# Altium PCB UL-SWAP-DAQ-3-MAIN.PcbDoc (part 1 of 2)
Units mil, origin at the board's own origin, x right, y up, seen from the top; angles counter-clockwise.
Board outline 1500 x 1860 mil, 4 copper layers (Top Layer, GND, PWR, Bottom Layer), stack 23.756 mil thick; 70 components, 75 nets, 346 pads, 55 vias.
Unrouted connection lines stored in the file: 21.
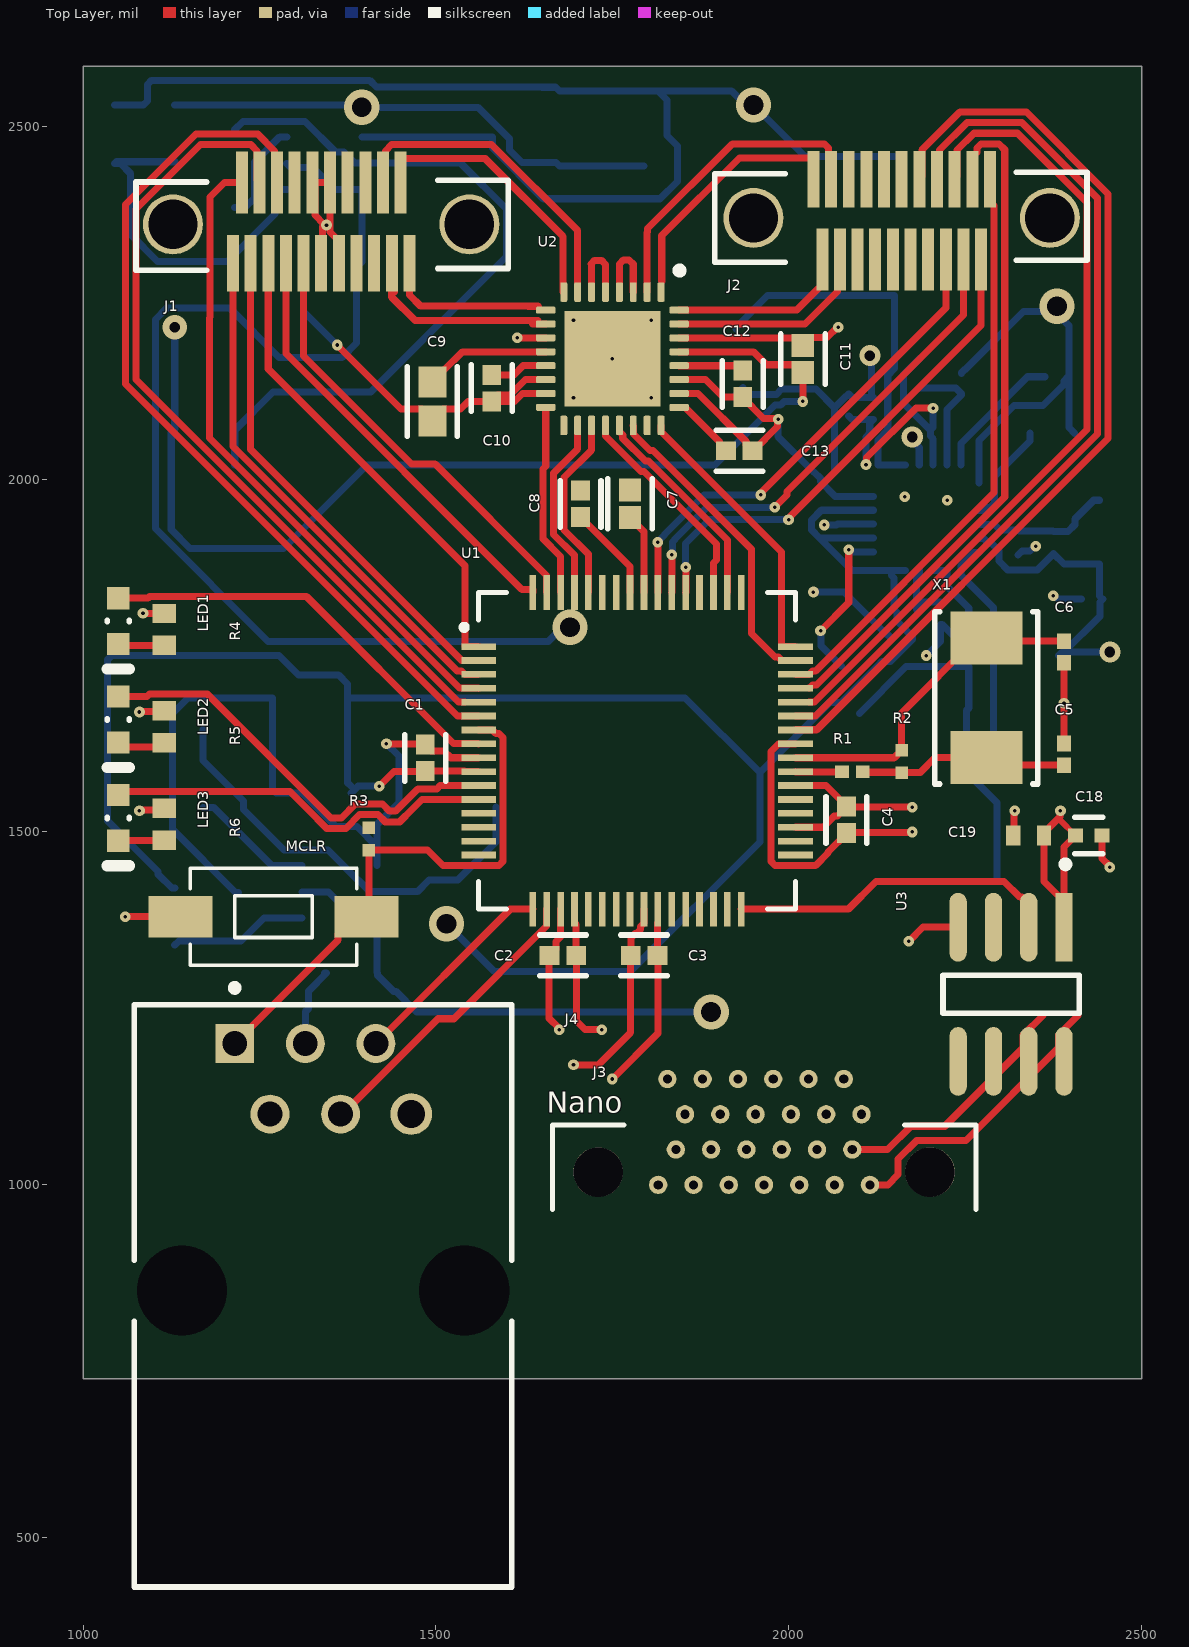
[diagram p0: Top Layer view]
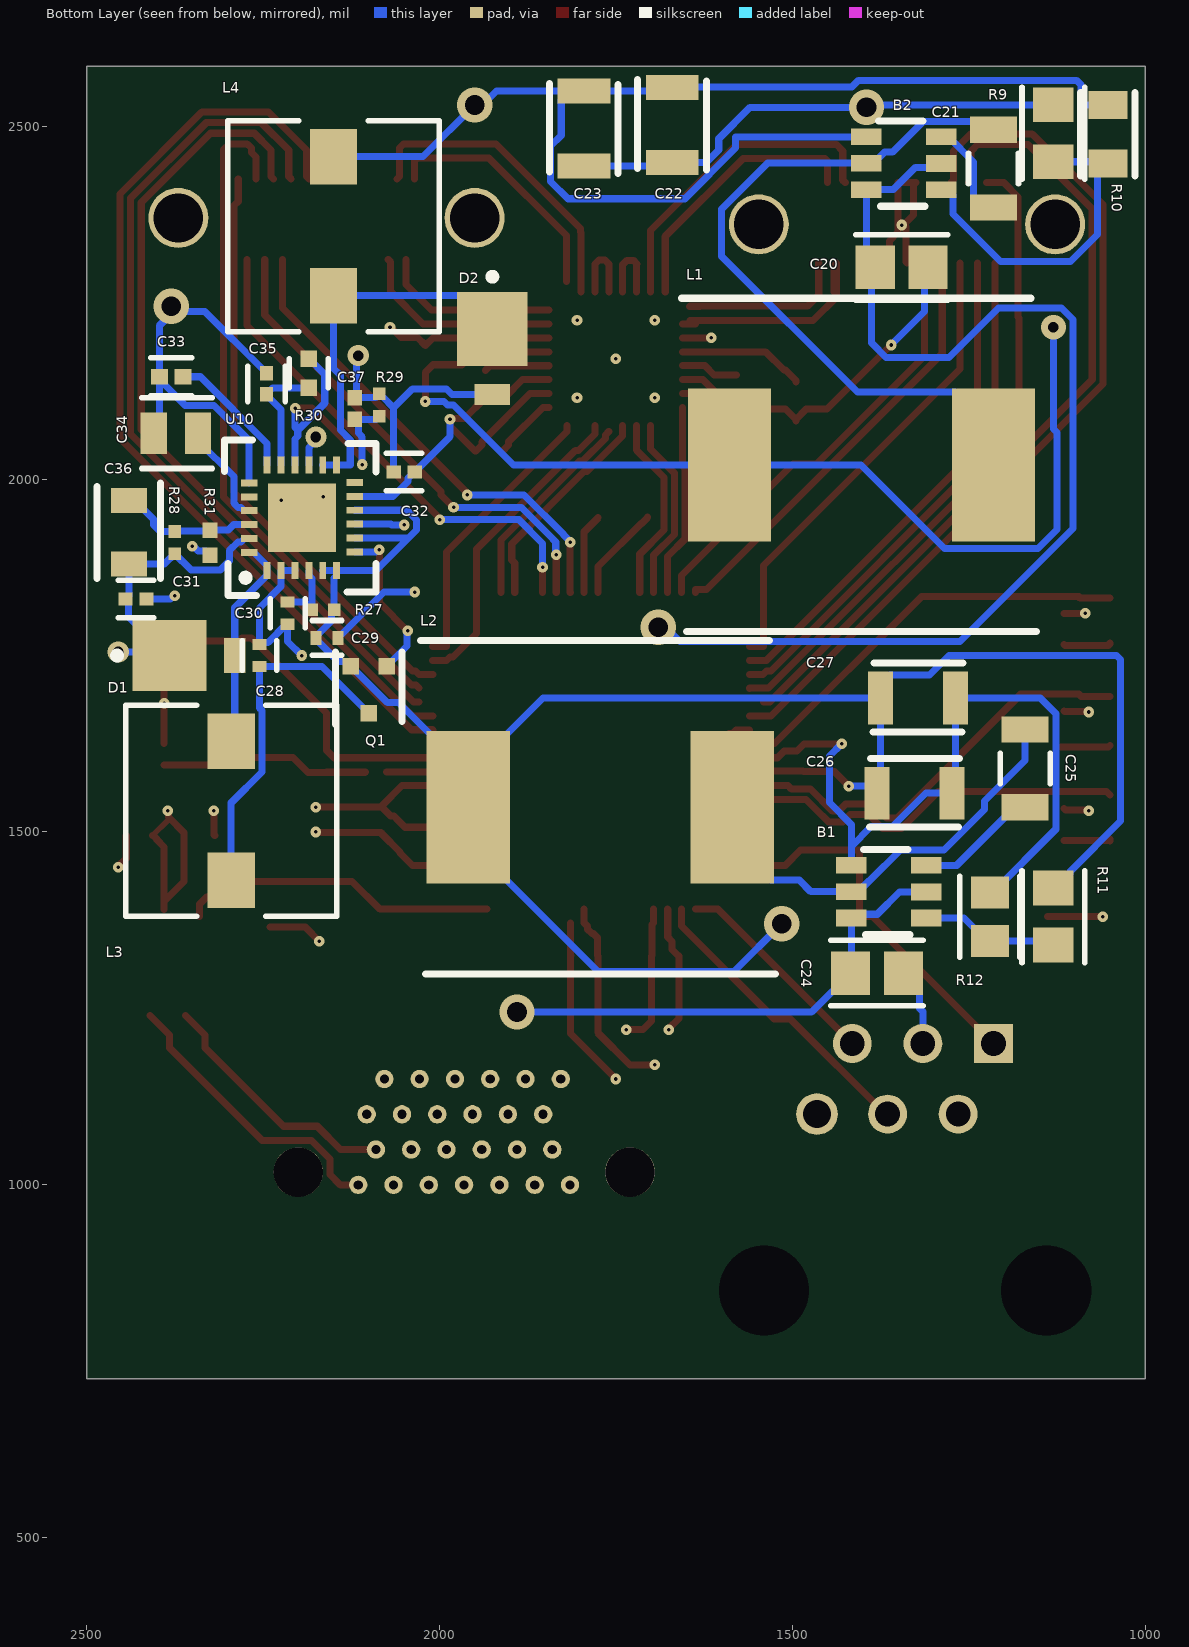
[diagram p1: Bottom Layer view, seen from below]
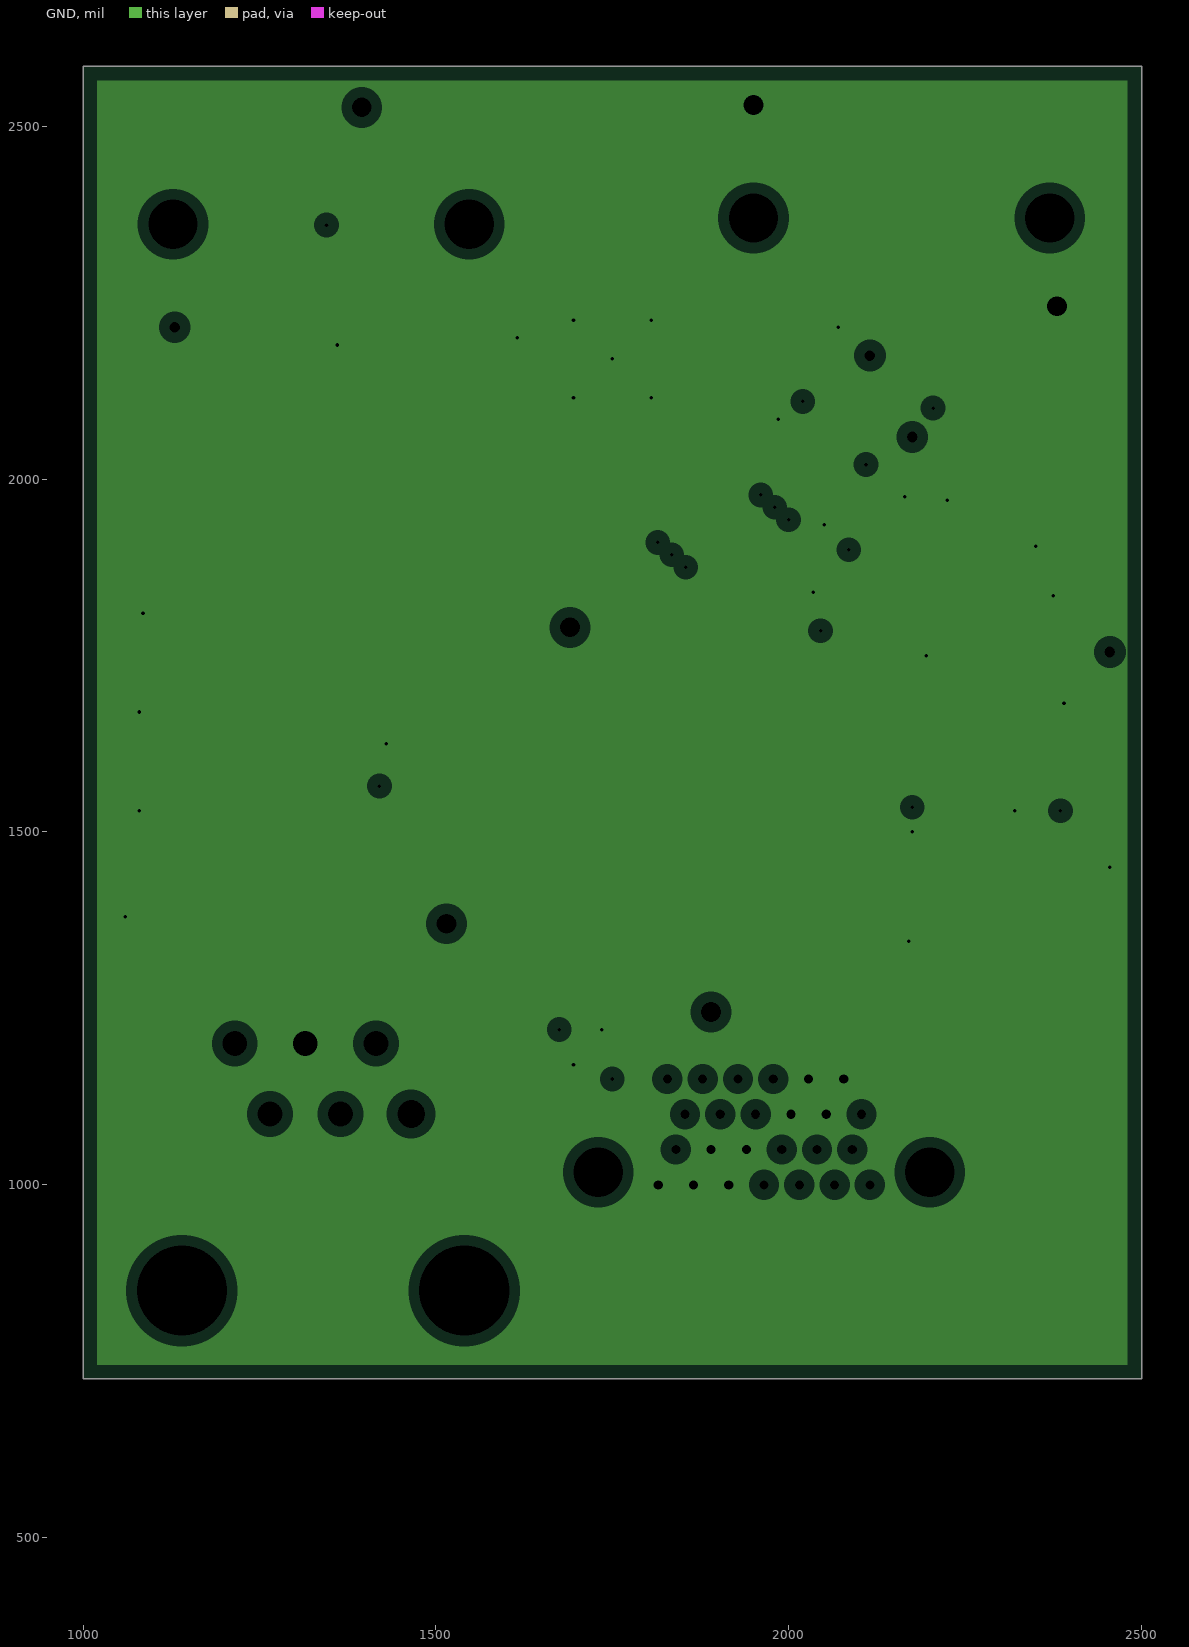
[diagram p2: GND, clearances drawn from the general rule]
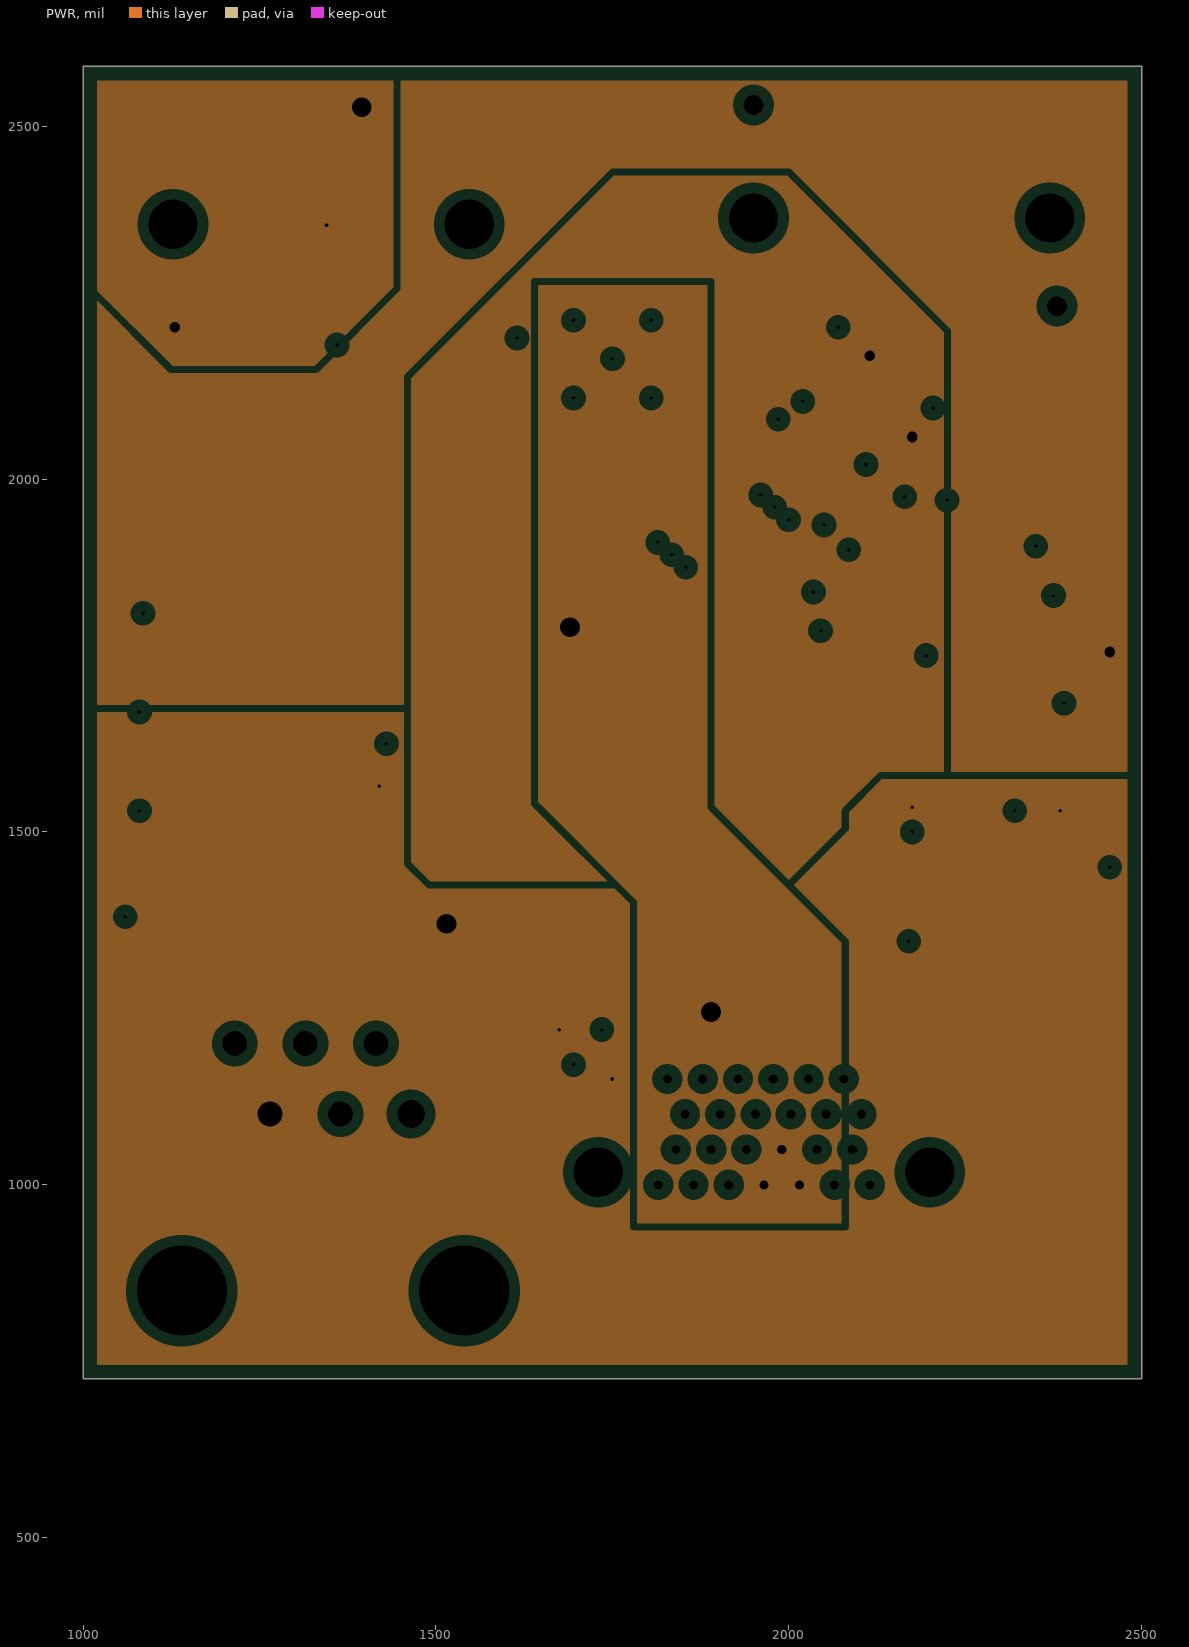
[diagram p3: PWR, clearances drawn from the general rule]
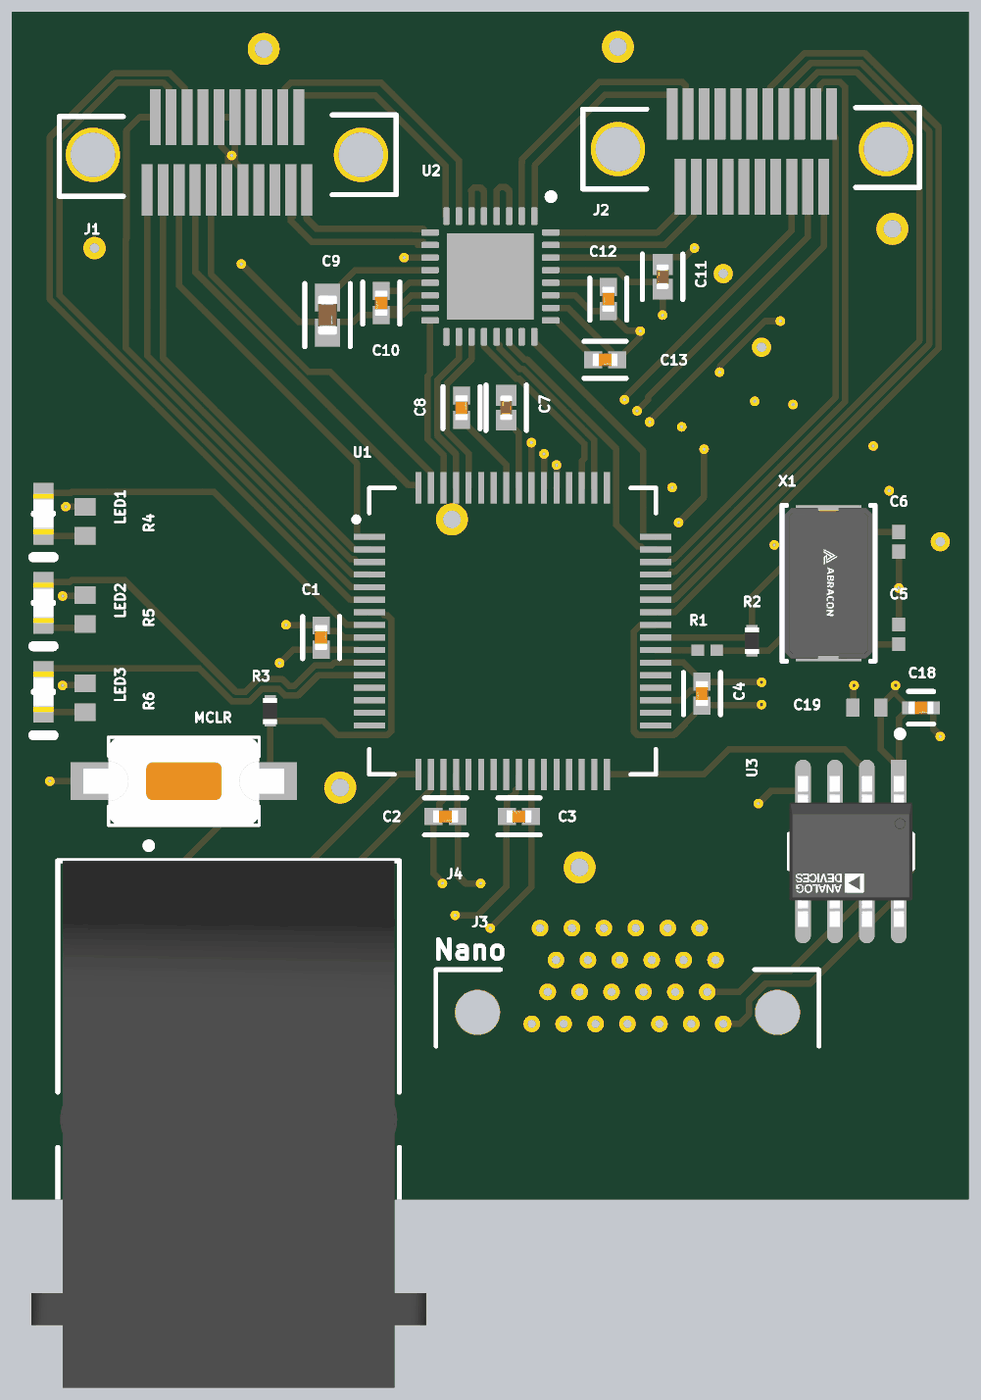
[diagram p4: 3D render of the assembled board from above, using the file's embedded part models]
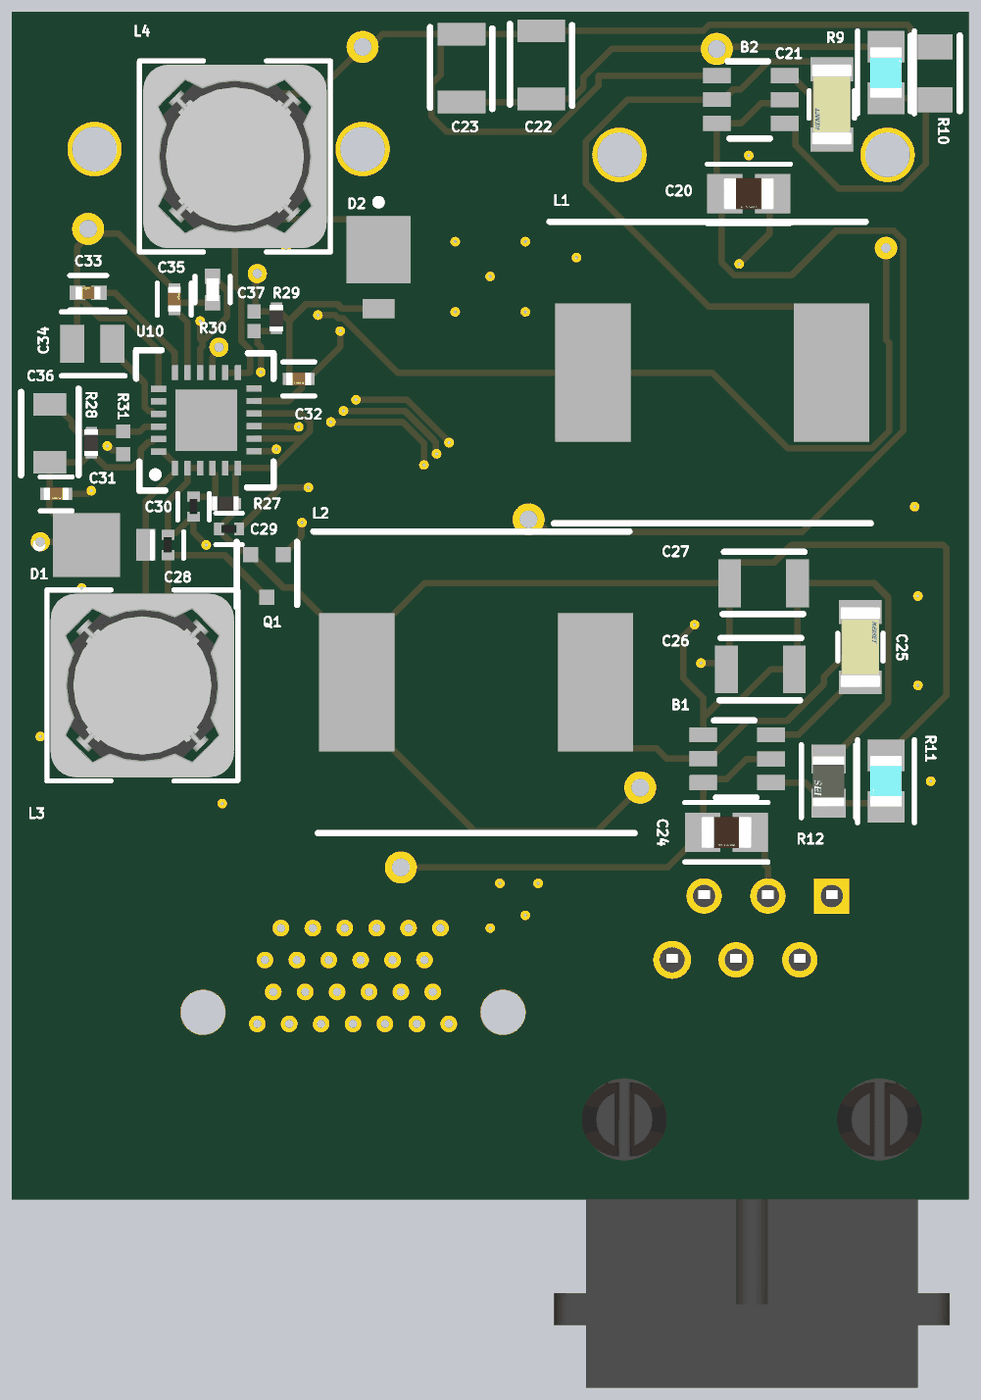
[diagram p5: 3D render of the assembled board from below, using the file's embedded part models]

## Layer stack, top to bottom
Top Solder: solder mask 0.4, Solder Resist, Dk 3.5
Top Layer: signal copper 1.4
Dielectric 2: prepreg 2.8, PP-006, Dk 4.1
GND: plane copper 1.378, net GND
Dielectric 1: dielectric 12.6, FR-4, Dk 4.8
PWR: plane copper 1.378, net (Multiple Nets)
Dielectric 3: prepreg 2.8, PP-006, Dk 4.1
Bottom Layer: signal copper 1.4
Bottom Solder: solder mask 0.4, Solder Resist, Dk 3.5

## Board outline
1000,725 2500,725 2500,2585 1000,2585

## Design rules (kind name [scope] priority, off if disabled: settings)
Clearance [All] p1: gap=5 ignorepadtopadclearanceinfootprint=FALSE
ComponentClearance [All] p1: gap=1 collisioncheckmode=3 verticalgap=100000 showdistances=FALSE
DiffPairsRouting [All] p1: maxlimit=10 minlimit=10 mostfreqgap=10 toplayer_minwidth=10 toplayer_maxwidth=15 toplayer_prefwidth=15 bottomlayer_minwidth=10 bottomlayer_maxwidth=15 bottomlayer_prefwidth=15 maxuncoupledlength=500
HoleSize [All] p1: absolutevalues=TRUE maxlimit=150 minlimit=1 maxpercent=80.000 minpercent=20.000
MinimumSolderMaskSliver [All] p1: minsoldermaskwidth=2
NetAntennae [All] p1: netantennaetolerance=5
PlaneClearance [All] p1: clearance=15
PlaneConnect OtherNets [All] p1: pad.planeconnectstyle=Direct pad.reliefexpansion=20 pad.reliefentries=4 pad.reliefconductorwidth=10 pad.reliefairgap=10 via.planeconnectstyle=Relief via.reliefexpansion=20 via.reliefentries=4 via.reliefconductorwidth=10 via.reliefairgap=10
PolygonConnect [All] p1: connectstyle=Relief reliefconductorwidth=10 reliefentries=4 polygonreliefangle="90 Angle" airgapwidth=10
RoutingVias [All] p1: holewidth=15 width=30 viastyle="Through Hole" minholewidth=10 minwidth=15 maxholewidth=50 maxwidth=100
ShortCircuit [All] p1: allowed=TRUE
SilkToSilkClearance [All] p1: silktosilkclearance=4
SilkToSolderMaskClearance [IsPad] p1: minsilkscreentomaskgap=4 clearancetoexposedcopper=TRUE
SolderMaskExpansion [All] p1: expansion=0 istentingtop=FALSE
Width [All] p1: maxlimit=200 minlimit=5 preferedwidth=10
20 further rules are at their usual default settings.

## Classes and differential pairs
component class U_TPS6513x: C28 C29 C30 C31 C32 C33 C34 C35 C36 C37 D1 D2 L3 L4 Q1 R27 R28 R29 R30 R31 U10
component class U_LVDS_Driver_Subsystem: C18 C19 J3 U3
component class U_LMR514203.3V: B1 C24 C25 C26 C27 L2 R11 R12
component class U_ICD4_Interface_Module: J4
component class U_ADC_Subsystem: C9 C10 C11 C12 C13 U2
component class MAIN-MODULE: J1 J2
component class Designator: C1 C2 C3 C4 C5 C6 C7 C8 LED1 LED2 LED3 MCLR R1 R2 R3 R4 R5 R6 SS U1 X1
differential pair DOUT: +DOUT_P -DOUT_N
differential pair ADC_CH6_CH7: +ADC_CH6_CH7_P -ADC_CH6_CH7_N
differential pair ADC_CH4_CH5: +ADC_CH4_CH5_P -ADC_CH4_CH5_N
differential pair ADC_CH2_CH3: +ADC_CH2_CH3_P -ADC_CH2_CH3_N
differential pair ADC_CH0_CH1: +ADC_CH0_CH1_P -ADC_CH0_CH1_N

## Components (designator, comment, footprint, x,y, rotation, side; value= is the part's Value field where it differs from the comment)
B1 "" LMR51420IC 1416.3,1452.8 r180 bottom
B2 "" LMR51420IC 1395,2485 r180 bottom
C1 "GRM155R61E104KA87D" FP-GRM155-0_05-IPC_A 1485,1605 r90 top
C2 "GRM155R61E104KA87D" FP-GRM155-0_05-IPC_A 1680,1325 r0 top
C3 "GRM155R61E104KA87D" FP-GRM155-0_05-IPC_A 1795,1325 r180 top
C4 "GRM155R61E104KA87D" FP-GRM155-0_05-IPC_A 2081.76,1517.22 r270 top
C5 "18pF" CAPC1005X55X25LL05T10 2390,1610 r90 top
C6 "18pF" CAPC1005X55X25LL05T10 2390,1755 r270 top
C7 "GRM155R60J106ME44D" FP-GRM155-0_2-IPC_A 1775,1965 r90 top
C8 "GRM155R61E104KA87D" FP-GRM155-0_05-IPC_A 1705,1965 r90 top
C9 "GRM188R60J476ME15D" FP-GRM188-0_2-IPC_B 1495,2110 r270 top
C10 "GRM155R61E104KA87D" FP-GRM155-0_05-IPC_A 1579.19,2128.84 r270 top
C11 "GRM155R60J106ME44D" FP-GRM155-0_2-IPC_A 2020,2170 r90 top
C12 "GRM155R61E104KA87D" FP-GRM155-0_05-IPC_A 1935,2135 r270 top
C13 "GRM155R61E104KA87D" FP-GRM155-0_05-IPC_A 1930,2040 r0 top
C18 "GRM155R61E104KA87D" FP-GRM155-0_05-MFG 2425,1495 r0 top
C19 "TACK106M002PTA" CAPC1005X70X10NL20T00 2340,1495 r0 top
C20 "UMK212BBJ225MD-T" FP-0805-L_2_0_0_2-W_1_25-IPC_A 1345,2300 r180 bottom
C21 "C0603C104K4PAC7867" "CAP CER 0.1UF 16V X7R 0603" 1215,2440 r0 bottom value="0.10 μF"
C22 "Comment" Cap22uF_C1206C226M4PAC7800 1670,2555 r180 bottom value=22uF
C23 "Comment" Cap22uF_C1206C226M4PAC7800 1795,2550 r180 bottom value=22uF
C24 "UMK212BBJ225MD-T" FP-0805-L_2_0_0_2-W_1_25-IPC_A 1380,1300 r180 bottom
C25 "C0603C104K4PAC7867" "CAP CER 0.1UF 16V X7R 0603" 1170,1590 r180 bottom value="0.10 μF"
C26 "Comment" Cap22uF_C1206C226M4PAC7800 1273.7,1555 r270 bottom value=22uF
C27 "Comment" Cap22uF_C1206C226M4PAC7800 1268.7,1690 r270 bottom value=22uF
C28 "4.7uF" FP-GRM15-MFG 2255,1750 r90 bottom value=0.10μF
C29 "4.7uF" FP-GRM15-MFG 2159.25,1775 r180 bottom value=0.10μF
C30 "GRM155R71C104KA88D" FP-GRM15-MFG 2215,1810 r270 bottom value=0.10μF
C31 "CL05A226MQ5QUNC" FP-CL746-IPC_C 2430,1830 r180 bottom
C32 "CL05A226MQ5QUNC" FP-CL746-IPC_C 2050,2010 r180 bottom
C33 "GRM155R71H472KA01D" FP-GRM155-0_05-IPC_B 2380,2145 r0 bottom
C34 "C0402C103J4RAC" Yemet_0603 2342.01,2065 r270 bottom value="10,000 pF"
C35 "GRM155R71C224KA12D" FP-GRM155-0_05-IPC_C 2245,2135 r90 bottom
C36 "CGA1A2C0G1E6R8D030BA" 885012007027 2440,1879.45 r0 bottom
C37 "GRM1555C1H7R5CA01D" CAPC1005X55X25LL05T10 2120,2100 r90 bottom
D1 "MBRM120ET3G" ONSC-POWERMITE-2-457-04_D_V 2330,1750 r180 bottom
D2 "MBRM120ET3G" ONSC-POWERMITE-2-457-04_D_V 1925,2160 r270 bottom
J1 "A28200-021" A28200-021 1547.5,2361 r180 top
J2 "A28200-021" A28200-021 1950,2370 r0 top
J3 "Nano-D-Connector" A28400-025 2115,1000 r0 top
J4 "5520470-3" TECO-5520470-3_V 1340,905 r0 top
L1 "Inductor" "MSS1246H-103MED 10uH" 1215,2020 r270 bottom value=10uH
L2 "MSS1260H-822MED" "MSS1246H-103MED 10uH" 1585,1535 r270 bottom value=8.2uH
L3 "7447789004" WE-PD-S-PB 2295,1530 r90 bottom
L4 "7447789004" WE-PD-S-PB 2150,2358.43 r270 bottom
LED1 "" KING-APT1608SGC_V 1050,1798.76 r270 top
LED2 "" KING-APT1608SGC_V 1050,1659.38 r270 top
LED3 "" KING-APT1608SGC_V 1050,1520 r270 top
MCLR "434121043816" 434121043816 1270,1380 r0 top
Q1 "Comment" PCBComponent_1 2100,1735 r180 bottom
R1 "0R" RESC1005X40X25LL05T10 2090,1585 r0 top
R2 "1M" RESC1005X40X25LL05T05 2160,1600 r270 top
R3 "10k" RESC1005X40X25LL05T05 1405,1490 r90 top
R4 "330" RESC1609X50X30LL10T20 1115,1786.94 r90 top
R5 "330" RESC1609X50X30LL10T20 1115,1648.82 r90 top
R6 "330" RESC1609X50X30LL10T20 1115,1510.69 r90 top
R9 "RK73G2ATTD1003F" FP-RK73G2A-IPC_A 1130,2490 r90 bottom
R10 "RMCF0805FT13K7CT-ND" RMCF0805FT13K7_13.7k 1052.87,2530 r180 bottom value=13.7K
R11 "RK73G2ATTD1003F" FP-RK73G2A-IPC_A 1130,1380 r270 bottom
R12 "RMCF0805FG22K1" FP-RMCF0805-IPC_B 1220,1380 r270 bottom
R27 "ERJ-2RKF1000X" RESC1005X40X25LL05T05 2165,1815 r0 bottom
R28 "ERJ-2RKF1004X" RESC1005X40X25LL05T05 2375,1910 r270 bottom
R29 "ERJ-2RKF1004X" RESC1005X40X25LL05T05 2085,2105 r270 bottom
R30 "CRCW0402121KFKED" FP-CRCW0402-e3-MFG 2185,2150 r90 bottom
R31 "ERJ-2RKF1303X" RESC1005X40X25NL05T05 2325,1910 r90 bottom
U1 "PIC32MX470-F512H-120MR" TQFP 1785,1615 r0 top
U2 "LTC2373CUH-16#PBF" LTC_2373_Footprint 1750.16,2170.51 r270 top
U3 "ADN4661BRZ" FP-R-8-IPC_A 2315,1270 r270 top
U10 "TPS6513x" TPS6513final 2194.68,1945.2 r180 bottom
X1 "20MHz" FP-ABM7-MFG 2280,1690 r270 top

## Footprints (in the part's own frame and the unit in brackets; to place one, negate y for a bottom-side part, rotate by r counter-clockwise, add the part's x,y. Pads: shape width x height; smd on the part's side, far side on the other; paste and mask are expansions set on the pad)
434121043816 [mm] "6.0*3.5mm vertical type, SMD, height 4.3mm, black actuator, 160gf, T&R"
  rect 2.3x1.5 smd: 1(-3.35,0) 2(3.35,0)
  silkscreen extent -3,-1.75 3,1.75, body extent -4,-1.75 4,1.75, height 4.3
885012007027 [mm] "CER 6.8pF 25V C0G/NP0 0805"
  rect 1.3x0.9 smd: 1(0,0) 2(0,-2.3)
  silkscreen extent -1.14,-2.92 1.14,0.51
A28200-021 [mil] "CONN NANO-D PLUG 21POS SMD SLDR"
  rect 17x80 smd: 1(85,55) 2(110,55) 3(135,55) 4(160,55) 5(185,55) 6(210,55) 7(235,55) 8(260,55) 9(285,55) 10(310,55) 11(335,55) ""(135,55)
  rect 17x88 smd: 12(97.5,-59) 13(122.5,-59) 14(147.5,-59) 15(172.5,-59) 16(197.5,-59) 17(222.5,-59) 18(247.5,-59) 19(272.5,-59) 20(297.5,-59) 21(322.5,-59)
  round 85 hole 70: ""(0,0) ""(420,0)
  silkscreen extent -55,-63 473,65
A28400-025 [mil] "Nano D Connector Dual Row - 4 row hole pattern"
  round 26 hole 13: 1(0,0) 2(-25,50) 3(-50,0) 4(-75,50) 5(-100,0) 6(-125,50) 7(-150,0) 8(-175,50) 9(-200,0) 10(-225,50) 11(-250,0) 12(-275,50) 13(-300,0) 14(-12,100) 15(-37,150) 16(-62,100) 17(-87,150) 18(-112,100) 19(-137,150) 20(-162,100) 21(-187,150) 22(-212,100) 23(-237,150) 24(-262,100) 25(-287,150)
  round 70 hole 70: ""(-385,18) ""(85,18)
  silkscreen extent -450,-35 150,85, body extent -438,-274 138,185, height 140
Cap22uF_C1206C226M4PAC7800 [mm]
  rect 1.9x0.9 smd: 1(0,0) 2(0,-2.7)
  silkscreen extent -1.25,-2.98 1.22,0.28
"CAP CER 0.1UF 16V X7R 0603" [mm]
  rect 1.7x0.95 smd paste+0 mask+0: 1(-0.002,1.402) 2(-0.002,-1.398)
  silkscreen extent -0.9,-0.55 0.9,0.55, body extent -0.8,-1.6 0.8,1.6, height 0.88
CAPC1005X55X25LL05T10 [mm] "Chip Capacitor, 2-Leads, Body 1.00x0.50mm, IPC High Density"
  rect 0.56x0.52 smd: 1(-0.39,0) 2(0.39,0)
  body extent -0.53,-0.28 0.53,0.28, height 0.55
CAPC1005X70X10NL20T00 [mm] "Chip Capacitor, 2-Leads, Body 1.00x0.50mm, IPC Medium Density"
  rect 0.52x0.72 smd: 1(-0.55,0) 2(0.55,0)
  body extent -0.6,-0.35 0.6,0.35, height 0.7
FP-0805-L_2_0_0_2-W_1_25-IPC_A [mil]
  rect 55.42x61.5 smd paste+0 mask+0: 1(-37.49,0) 2(37.49,0)
  silkscreen extent -65,-46 65,46, body extent -39,-25 39,25, height 37
FP-ABM7-MFG [mm]
  rect 1.9x2.6 smd paste+0 mask+0: 1(-2.15,0) 2(2.15,0)
  silkscreen extent -3.1,-1.85 3.1,1.85, body extent -3.2,-1.95 3.2,1.95, height 0.25
FP-CL746-IPC_C [mil]
  rect 20.29x18.6 smd paste+0 mask+0: 1(-14.9,0) 2(14.9,0)
  silkscreen extent -25,-27 25,27, body extent -20,-10 20,10, height 22
FP-CRCW0402-e3-MFG [mm]
  rect 0.6x0.6 smd paste+0 mask+0: 1(-0.525,0) 2(0.525,0)
  silkscreen extent -0.53,-0.7 0.53,0.7, body extent -0.5,-0.25 0.5,0.25, height 0.4
FP-GRM15-MFG [mm]
  rect 0.4x0.5 smd paste+0 mask+0: 1(-0.4,0) 2(0.4,0)
  silkscreen extent -0.53,-0.63 0.53,0.63, body extent -0.3,-0.16 0.3,0.16, height 0.33
FP-GRM155-0_2-IPC_A [mil]
  rect 32.6x31.74 smd paste+0 mask+0: 1(-19.25,0) 2(19.25,0)
  silkscreen extent -36,-32 36,32, body extent -43,-24 43,24, height 10
FP-GRM155-0_05-IPC_A [mil]
  rect 28.16x26.48 smd paste+0 mask+0: 1(-18.84,0) 2(18.84,0)
  silkscreen extent -33,-29 33,29, body extent -41,-21 41,21, height 10
FP-GRM155-0_05-IPC_B [mil]
  rect 24.23x22.54 smd paste+0 mask+0: 1(-16.87,0) 2(16.87,0)
  silkscreen extent -29,-27 29,27, body extent -20,-10 20,10, height 22
FP-GRM155-0_05-IPC_C [mil]
  rect 20.29x18.6 smd paste+0 mask+0: 1(-14.9,0) 2(14.9,0)
  silkscreen extent -25,-27 25,27, body extent -20,-10 20,10, height 22
FP-GRM155-0_05-MFG [mm]
  rect 0.55x0.5 smd paste+0 mask+0: 1(-0.475,0) 2(0.475,0)
  silkscreen extent -0.5,-0.65 0.5,0.65, body extent -0.85,-0.38 0.85,0.38, height 0.25
FP-GRM188-0_2-IPC_B [mil]
  rect 43.51x39.61 smd paste+0 mask+0: 1(-27.58,0) 2(27.58,0)
  silkscreen extent -49,-36 49,36, body extent -59,-30 59,30, height 10
FP-R-8-IPC_A [mil]
  rect 97.4x24.49 smd paste+0 mask+0: 1(-95.12,75)
  rrect100% 97.4x24.49 smd paste+0 mask+0: 2(-95.12,25) 3(-95.12,-25) 4(-95.12,-75) 5(95.12,-75) 6(95.12,-25) 7(95.12,25) 8(95.12,75)
  silkscreen extent -189,-96 27,96, body extent -164,-116 164,116, height 10
FP-RK73G2A-IPC_A [mil]
  rect 49.42x57.56 smd paste+0 mask+0: 1(-40.37,0) 2(40.37,0)
  silkscreen extent -65,-45 65,45, body extent -39,-25 39,25, height 24
FP-RMCF0805-IPC_B [mil]
  rect 45.46x53.63 smd paste+0 mask+0: 1(-34.48,0) 2(34.48,0)
  silkscreen extent -57,-43 57,43, body extent -39,-25 39,25, height 26
KING-APT1608SGC_V [mm] "SMD, 2-Leads, Body 0.8x1.6mm"
  rect 0.8x0.8 smd: 1(-0.825,0) 2(0.825,0)
  silkscreen extent -0.03,-0.4 1.73,0.4, body extent -0.8,-0.4 0.81,0.4, height 0.76
LMR51420IC [mm]
  rect 1.1x0.6 smd: 1(0,0) 2(0,-0.95) 3(0,-1.9) 4(2.7,-1.9) 5(2.7,-0.96) 6(2.7,0)
  silkscreen extent 0.43,-2.5 2.11,0.57
LTC_2373_Footprint [mm]
  rrect40% 0.7x0.25 smd: 1(-2.4,1.75) 2(-2.4,1.25) 3(-2.4,0.75) 4(-2.4,0.25) 5(-2.4,-0.25) 6(-2.4,-0.75) 7(-2.4,-1.25) 8(-2.4,-1.75) 17(2.4,-1.75) 18(2.4,-1.25) 19(2.4,-0.75) 20(2.4,-0.25) 21(2.4,0.25) 22(2.4,0.75) 23(2.4,1.25) 24(2.4,1.75)
  rrect40% 0.25x0.7 smd: 9(-1.75,-2.4) 10(-1.25,-2.4) 11(-0.75,-2.4) 12(-0.25,-2.4) 13(0.25,-2.4) 14(0.75,-2.4) 15(1.25,-2.4) 16(1.75,-2.4) 25(1.75,2.4) 26(1.25,2.4) 27(0.75,2.4) 28(0.25,2.4) 29(-0.25,2.4) 30(-0.75,2.4) 31(-1.25,2.4) 32(-1.75,2.4)
  rect 3.45x3.45 smd: 33(0,0)
  silkscreen extent -3.3,2.29 -3.05,2.54, body extent -2.54,-2.54 2.54,2.54, height 0.81
"MSS1246H-103MED 10uH" [mm]
  rect 5.5x3 smd: 1(0,0) 2(0,-9.5)
  silkscreen extent -6,-11.23 6,1.55
ONSC-POWERMITE-2-457-04_D_V [mil] "POWERMITE, 2-Leads, Body 1.965x1.9mm"
  rect 105.12x100 smd: 1(-52.56,0)
  rect 30x50 smd: 2(40,0)
  silkscreen extent -132,-5 -122,5, body extent -80,-37 -3,37, height 45
PCBComponent_1 [mm]
  rect 0.6x0.6 smd: 1(0,-1.7) 2(0.65,0) 3(-0.65,0)
  silkscreen extent -1.2,-2.1 1.2,0.5
RESC1005X40X25LL05T05 [mm] "Chip Resistor, 2-Leads, Body 1.05x0.55mm, IPC High Density"
  rect 0.45x0.45 smd: 1(-0.4,0) 2(0.4,0)
  body extent -0.53,-0.28 0.53,0.28, height 0.4
RESC1005X40X25LL05T10 [mm] "Chip Resistor, 2-Leads, Body 1.00x0.50mm, IPC High Density"
  rect 0.5x0.45 smd: 1(-0.375,0) 2(0.375,0)
  body extent -0.53,-0.27 0.53,0.28, height 0.4
RESC1005X40X25NL05T05 [mm] "Chip Resistor, 2-Leads, Body 1.00x0.50mm, IPC Medium Density"
  rect 0.55x0.55 smd: 1(-0.45,0) 2(0.45,0)
  body extent -0.53,-0.27 0.53,0.28, height 0.4
RESC1609X50X30LL10T20 [mm] "Chip Resistor, 2-Leads, Body 1.55x0.85mm, IPC High Density"
  rect 0.7x0.85 smd: 1(-0.575,0) 2(0.575,0)
  body extent -0.82,-0.48 0.82,0.48, height 0.5
RMCF0805FT13K7_13.7k [mm]
  rect 1.4x1 smd: 1(0,0) 2(0,-2.1)
  silkscreen extent -0.97,-2.55 0.97,0.45
TECO-5520470-3_V [mm] "THD, 6-Leads, Body 20.96x13.59mm, Pitch 1.27mm"
  rect 1.4x1.4 hole 0.89: 1(-3.175,7.5)
  round 1.4 hole 0.89: 2(-1.905,4.96) 3(-0.635,7.5) 4(0.635,4.96) 5(1.905,7.5)
  round 1.5 hole 1: 6(3.175,4.96)
  round 3 hole 3.25 unplated: MH1(-5.075,-1.39) MH2(5.085,-1.39)
  silkscreen extent -6.8,-12.06 6.8,9.62, body extent -7.87,-12.06 7.87,8.9, height 16.04
TPS6513final [mm] "boost and inverter"
  rect 0.25x0.6 smd: 1(-1.254,-1.9) 2(-0.754,-1.9) 3(-0.254,-1.9) 4(0.246,-1.9) 5(0.746,-1.9) 6(1.246,-1.9) 13(1.246,1.9) 14(0.746,1.9) 15(0.246,1.9) 16(-0.254,1.9) 17(-0.754,1.9) 18(-1.254,1.9)
  rect 0.6x0.25 smd: 7(1.9,-1.23) 8(1.9,-0.73) 9(1.9,-0.23) 10(1.9,0.27) 11(1.9,0.77) 12(1.9,1.27) 19(-1.9,1.254) 20(-1.9,0.754) 21(-1.9,0.254) 22(-1.9,-0.246) 23(-1.9,-0.746) 24(-1.9,-1.246)
  rect 2.45x2.45 smd: 25(0,0)
  silkscreen extent -2.79,-2.79 2.67,2.79
TQFP [mm]
  rect 1.25x0.24 smd: 1(-5.7,3.75) 2(-5.7,3.25) 3(-5.7,2.75) 4(-5.7,2.25) 5(-5.7,1.75) 6(-5.7,1.25) 7(-5.7,0.75) 8(-5.7,0.25) 9(-5.7,-0.25) 10(-5.7,-0.75) 11(-5.7,-1.25) 12(-5.7,-1.75) 13(-5.7,-2.25) 14(-5.7,-2.75) 15(-5.7,-3.25) 16(-5.7,-3.75) 33(5.7,-3.75) 34(5.7,-3.25) 35(5.7,-2.75) 36(5.7,-2.25) 37(5.7,-1.75) 38(5.7,-1.25) 39(5.7,-0.75) 40(5.7,-0.25) 41(5.7,0.25) 42(5.7,0.75) 43(5.7,1.25) 44(5.7,1.75) 45(5.7,2.25) 46(5.7,2.75) 47(5.7,3.25) 48(5.7,3.75)
  rect 0.24x1.25 smd: 17(-3.75,-5.7) 18(-3.25,-5.7) 19(-2.75,-5.7) 20(-2.25,-5.7) 21(-1.75,-5.7) 22(-1.25,-5.7) 23(-0.75,-5.7) 24(-0.25,-5.7) 25(0.25,-5.7) 26(0.75,-5.7) 27(1.25,-5.7) 28(1.75,-5.7) 29(2.25,-5.7) 30(2.75,-5.7) 31(3.25,-5.7) 32(3.75,-5.7) 49(3.75,5.7) 50(3.25,5.7) 51(2.75,5.7) 52(2.25,5.7) 53(1.75,5.7) 54(1.25,5.7) 55(0.75,5.7) 56(0.25,5.7) 57(-0.25,5.7) 58(-0.75,5.7) 59(-1.25,5.7) 60(-1.75,5.7) 61(-2.25,5.7) 62(-2.75,5.7) 63(-3.25,5.7) 64(-3.75,5.7)
  silkscreen extent -6.32,-5.7 5.7,5.7
WE-PD-S-PB [mm] "SMD Inductor, 2-Leads, Body 7.3x7.3x3.5 mm"
  rect 2x1.7 smd: 1(-2.5,0) 2(2.5,0)
  silkscreen extent -3.8,-3.8 3.8,3.8, body extent -3.65,-3.65 3.65,3.65, height 3.19
Yemet_0603 [mm] "220nF 16V X7R 10%"
  rect 1.5x0.95 smd: 1(0,0) 2(0,-1.6)
  silkscreen extent -1.27,-2.03 1.27,0.51

## Part data
B1 B2: library part Component_1
C1 C2 C3 C4 C8 C10 C12 C13 C18: library part CMP-2008-04580-2, "CAP CER 0.1UF 25V X5R 0402", Capacitance=100nF, Case Code (Imperial)=0402, Case Code (Metric)=1005, Dielectric=X5R, Max Operating Temperature=85°C, Min Operating Temperature=-55°C, Package Quantity=10000, Tolerance=10%, Voltage=25V, Case/Package=0402, Depth=0.5mm, Height=0.5mm, Lead Free="Lead Free", Lead/Base Style=Bayonet, Length=1mm, Material=Ceramic, Mount="Surface Mount", Packaging="Cut Tape", Radiation Hardening=No, REACH SVHC="No SVHC", RoHS Compliant=Yes, Series=GRM, Termination=Standard, Thickness=0.022inch, Voltage Rating=25V, Voltage Rating (DC)=25V, Weight=0.000388oz, Width=0.5mm
C5 C6: library part CMP-2008-04271-1, "GRM1555C1H180GA01D", Manufacturer=Murata, Part Number=GRM1555C1H180GA01D
C7 C11: library part CMP-2000-05265-2, "CAP CER 10UF 6.3V X5R 0402", Capacitance=10uF, Case Code (Imperial)=0402, Case Code (Metric)=1005, Dielectric=X5R, Max Operating Temperature=85°C, Min Operating Temperature=-55°C, Package Quantity=10000, Tolerance=20%, Voltage=6.3V, Case/Package=0402, Depth=0.5mm, Height=0.5mm, Lead Free="Lead Free", Length=1mm, Mount="Surface Mount", Packaging="Tape and Reel", REACH SVHC="No SVHC", RoHS Compliant=Yes, Series=GRM, Termination=SMD/SMT, Thickness=0.022inch, Voltage Rating=6.3V, Voltage Rating (DC)=6.3V, Width=0.5mm
C9: library part CMP-2000-05444-2, "Chip Multilayer Ceramic Capacitors for General Purpose, 0603, 47uF, X5R, 15%, 20%, 6.3V", Capacitance=47uF, Case Code (Imperial)=0603, Case Code (Metric)=1608, Dielectric=X5R, Max Operating Temperature=85°C, Min Operating Temperature=-55°C, Tolerance=20%, Voltage Rating=6.3V, Case/Package=0603, Length=0.063inch, Mount="Surface Mount", Packaging="Tape and Reel", Thickness=0.039inch, Voltage Rating (DC)=6.3V, Width=0.031inch
C19: library part CMP-2008-00067-1, Manufacturer="AVX Interconnect / Elco", Part Number=TACK106M002PTA
C20 C24: library part CMP-14477-004278-2, "Multilayer Ceramic Capacitor 2.2uF 50V X5R 20% SMD 0803 T/R", Capacitance=2.2uF, Case Code (Imperial)=0805, Case Code (Metric)=2012, Max Operating Temperature=85°C, Min Operating Temperature=-55°C, Tolerance=20%, Voltage Rating=50V, Case/Package=0805, Mount="Surface Mount", Packaging="Tape and Reel", RoHS Compliant=Yes
C21 C25: library part b4654b650e69147ec39a6b967a45e02, "CAP CER 0.1UF 16V X5R 0603", Capacitance="0.10 μF", Manufacturer=KEMET, Package=C0603C-CF, Temperature="-55°C to +125°C", Temperature Characteristic=X5R, Temperature Coefficient=30ppm/°C, Temperature Range High=+125°C, Temperature Range Low=-55°C, Tolerance=0.1, Voltage Rating="16 V", Automotive=Yes, Automotive Grade="Grade 1", Category=Cap, ComponentLink2Description=Datasheet, ComponentLink2URL=https://api.kemet.com/component-edge/download/datasheet/C0603C100J5GACAUTO.pdf, Device Class L1="Passive Components", Device Class L2=Capacitors, Device Class L3="Ceramic Capacitors", Digikey Description="CAP CER 0.1UF 16V X5R 0603", Height=0.87mm, Lead Free=Yes, Manufacturer Part Number=C0603C104K4PAC7867, Material=Ceramic, Octopart=https://octopart.com/c0603c104k4pactu-kemet-12592163, RoHS=TRUE
C22 C23 C26 C27: library part Cap, "Capacitor", LatestRevisionDate=17-Jul-2002, LatestRevisionNote="Re-released for DXP Platform.", PackageDescription="Radial Cap, Thru-Hole; 2 Leads; 0.3 in Pin Spacing", PackageReference=RAD-0.3, Published=8-Jun-2000, Publisher="Altium Limited"
C28 C29: library part CMP-2100-03641-2, "CAP CER 0.1UF 16V X7R 0402", Capacitance=0.10μF, Manufacturer=Murata, Manufacturer Part Number=GRM155R71C104KA88D, Package=GRM15, Temperature="-55°C to +125°C", Temperature Characteristic=X7R, Temperature Range High=+125°C, Temperature Range Low=-55°C, Tolerance=10%, Voltage Rating=16Vdc, Category=Cap, ComponentLink2Description=Datasheet, ComponentLink2URL=https://search.murata.co.jp/Ceramy/image/img/A01X/G101/ENG/GRM155R71H471KA01-01A.pdf, Device Class L1="Passive Components", Device Class L2=Capacitors, Device Class L3="Ceramic Capacitors", Digikey Description="CAP CER 0.1UF 16V X7R 0402", Height=0.55mm, Ipc Land Pattern Name=CAPC10050X219, Lead Free=yes, Material=Ceramic, Mouser Description="0402 0.1 uF 16V ±10 % Tolerance X7R SMT Multilayer Ceramic Capacitor", Octopart=https://octopart.com/grm155r71c104ka88d-murata-196880, RoHS=TRUE, Standoff Height=0mm
C30: library part CMP-2100-03641-2, "CAP CER 0.1UF 16V X7R 0402", Capacitance=0.10μF, Manufacturer=Murata, Package=GRM15, Temperature="-55°C to +125°C", Temperature Characteristic=X7R, Temperature Range High=+125°C, Temperature Range Low=-55°C, Tolerance=10%, Voltage Rating=16Vdc, Category=Cap, ComponentLink2Description=Datasheet, ComponentLink2URL=https://search.murata.co.jp/Ceramy/image/img/A01X/G101/ENG/GRM155R71H471KA01-01A.pdf, Device Class L1="Passive Components", Device Class L2=Capacitors, Device Class L3="Ceramic Capacitors", Digikey Description="CAP CER 0.1UF 16V X7R 0402", Height=0.55mm, Ipc Land Pattern Name=CAPC10050X219, Lead Free=yes, Manufacturer Part Number=GRM155R71C104KA88D, Material=Ceramic, Mouser Description="0402 0.1 uF 16V ±10 % Tolerance X7R SMT Multilayer Ceramic Capacitor", Octopart=https://octopart.com/grm155r71c104ka88d-murata-196880, RoHS=TRUE, Standoff Height=0mm
C31 C32: library part CMP-13271-000286-1, "Cap Ceramic 22uF 6.3V X5R ±20% SMD 0402 +85°C Paper T/R", Capacitance=22uF, Case Code (Imperial)=0402, Case Code (Metric)=1005, Max Operating Temperature=85°C, Min Operating Temperature=-55°C, Tolerance=20%, Voltage Rating=6.3V, Case/Package=0402, Length=0.039inch, Mount="Surface Mount", Packaging="Tape and Reel", Thickness=0.022inch, Width=0.02inch
C33: library part CMP-2008-04663-5, "Chip Multilayer Ceramic Capacitors for General Purpose, 0402, 4700pF, X7R, 15%, 10%, 50V", Capacitance=4.7nF, Case Code (Imperial)=0402, Case Code (Metric)=1005, Dielectric=X7R, Max Operating Temperature=125°C, Min Operating Temperature=-55°C, Package Quantity=1, Tolerance=10%, Voltage=50V, Case/Package=0402, Depth=0.5mm, Height=0.5mm, Lead Free="Lead Free", Length=1mm, Material=Ceramic, Mount="Surface Mount", Packaging="Tape and Reel", Radiation Hardening=No, REACH SVHC="No SVHC", Termination=SMD/SMT, Thickness=0.022inch, Voltage Rating=50V, Voltage Rating (DC)=50V, Width=0.02inch
C34: library part b4654b650e69147ec39a6b967a45e02, "C0402 10,000 pF X7R 5.00% 16 V", Capacitance="10,000 pF", Manufacturer=Kemet, Package=C0402-BB, Temperature="-55°C to +125°C", Temperature Characteristic=X7R, Temperature Coefficient=15%, Temperature Range High=+125°C, Temperature Range Low=-55°C, Tolerance=0.05, Voltage Rating="16 V", Automotive=No, Category=Cap, ComponentLink2Description=Datasheet, ComponentLink2URL=https://content.kemet.com/datasheets/KEM_C1002_X7R_SMD.pdf, Device Class L1="Passive Components", Device Class L2=Capacitors, Device Class L3="Ceramic Capacitors", Height=0.55mm, Ipc Land Pattern Name=CAPC10050X50, Lead Free=Yes, Manufacturer Part Number=C0402C103J4RAC, Material=Ceramic, Mouser Description="Multilayer Ceramic Capacitors MLCC - SMD/SMT 16volts 0.01uF 5% X7R", Octopart=https://octopart.com/c0402c103j4rac-kemet-8293494, RoHS=TRUE
C35: library part CMP-1034-02089-3, "Chip Multilayer Ceramic Capacitors for General Purpose, 0402, 0.22uF, X7R, 15%, 10%, 16V", Capacitance=220nF, Case Code (Imperial)=0402, Case Code (Metric)=1005, Dielectric=X7R, Max Operating Temperature=125°C, Min Operating Temperature=-55°C, Package Quantity=1, Tolerance=10%, Voltage=16V, Case/Package=0402, Depth=0.5mm, Height=0.5mm, Lead Free="Lead Free", Length=1mm, Material=Ceramic, Mount="Surface Mount", Packaging="Tape and Reel", Radiation Hardening=No, REACH SVHC="No SVHC", Termination=SMD/SMT, Thickness=0.022inch, Voltage Rating=16V, Voltage Rating (DC)=16V, Width=0.02inch
C36: library part b4654b650e69147ec39a6b967a45e02, "Cap Ceramic 6.8pF 25V C0G 0.5pF Pad SMD 0201 125°C Automotive T/R", Capacitance=6.8pF, Case Code (Imperial)=0201, Case Code (Metric)=0603, Dielectric=C0G, Max Operating Temperature=125°C, Min Operating Temperature=-55°C, Package Quantity=1, Ratings=AEC-Q200, Voltage Rating=25V, Case/Package=0201, Composition=Ceramic, Depth=0.3mm, Height=0.3mm, Length=0.6mm, Mount="Surface Mount", Packaging="Tape and Reel", Termination=SMD/SMT, Thickness=0.013inch, Voltage Rating (DC)=25V, Weight=6E-06oz, Width=0.012inch
C37: library part CMP-1034-00562-2, Manufacturer=Murata, Part Number=GRM1555C1H7R5CA01D
D1 D2: library part CMP-1055-00280-1, "Schottky Power Rectifier, 2-Pin Powermite, Pb-Free, Tape and Reel", Manufacturer="On Semiconductor", ComponentLink1Description="Manufacturer URL", ComponentLink1URL=http://www.onsemi.com/, ComponentLink2Description=Datasheet, ComponentLink2URL=http://www.onsemi.cn/pub_link/Collateral/MBRM120E-D.PDF, ComponentLink3Description="Package Specification", ComponentLink3URL=http://www.onsemi.com/pub_link/Collateral/457-04.PDF, Configuration=Single, DatasheetVersion="Rev. 3", IFSM Max (A)=50, Mounting Technology="Surface Mount", PackageDescription="2-Pin POWERMITE, Body 1.965 x 1.9 mm", PackageReference=POWERMITE-2-457-04, PackageVersion="Rev. F, 05/2013", Packing="Tape and Reel", PartNumber=MBRM120ET3G, RoHS=TRUE
J1 J2: "CONN NANO-D PLUG 21POS SMD SLDR"
J4: library part CMP-1682-00001-5, "Modular Jack, 6 Position, Right Angle, RoHS, Tray", Colour=Black, Current Rating="1.5 A", Manufacturer="TE Connectivity", Max Voltage Rating (AC)="150 V", Package Quantity=176, ComponentLink1Description="Manufacturer URL", ComponentLink1URL=http://www.te.com/, ComponentLink2Description=Datasheet, ComponentLink2URL=http://www.te.com/commerce/DocumentDelivery/DDEController?Action=srchrtrv&DocNm=5520470&DocType=Customer+Drawing&DocLang=English, Contact Finish=Gold, Contact Material=Bronze, Contact Plating=Gold, DatasheetVersion="Rev. B1, 03/2011", Height="16.13 mm", Housing Material=PBT, Lead Pitch="2.54 mm", Length="13.34 mm", Mount="Through Hole", Mounting Technology="Through Hole", PackageDescription="Female Header, Pitch 1.27 mm, 2 x 3 Position, Height 16.13 mm, Tail Length 4.32 mm", PackageReference=5520470-3, Packaging=Tray, Pins=6, REACH SVHC=Unknown, RoHSCompliant=true, Voltage Rating="150 V"
L2: library part Inductor, "Inductor", Code_IEC=1005, Code_JEITA=0402, LatestRevisionDate=29-May-2009, LatestRevisionNote="IPC-7351 Footprint Added.", PackageDescription="Chip Inductor", PackageReference=0402-A, Published=8-Jun-2000, Publisher="Altium Limited"
L3 L4: library part CMP-1396-00050-1, "SMD-Shielded Power Inductor WE-PD, L=4.70 µH", Inductance="4.70 ÂµH", Manufacturer="Wuerth Elektronik", ComponentLink1Description="Manufacturer URL", ComponentLink1URL=http://www.we-online.com, ComponentLink2Description=Datasheet, ComponentLink2URL=http://www.we-online.de/katalog/media/pdf/7447789004.pdf, PackageDescription="SMD Inductor, 2-Leads, Body 7.3 x 7.3 mm", PackageReference=WE-PD-S-PB, PartNumber=7447789004
LED1 LED2 LED3: library part CMP-2000-05789-1, "Super Bright Green LED, 62.5 mW, 25 mA, -40 to 85 degC, 2-Pin SMD, RoHS, Tape and Reel, APT1608SGC", Color=Green, Current - Test=20mA, Manufacturer=Kingbright, Millicandela Rating=15mcd, Package / Case=0603(1608Metric), Package Description="2-Pin Surface Mount Device, Body 0.8 x 1.6 mm", Package Reference=APT1608SGC, Standard Package=2,000, Voltage - Forward (Vf) (Typ)=2.2V, 3D Model="APT1608x.sldprt /  / APT1608x.pro /  / APT1608x.igs /  / APT1608x.stp", Catalog Drawings="APT1608SeriesTop /  / APT1608SeriesSide", Category=Optoelectronics, Datasheet URL=https://datasheet.ciiva.com/2113/apt1608sgc-2113808.pdf, Datasheet Version="Rev. 16B, 02/2012", Family=LEDIndication-Discrete, Height=0.75mm, Lens Style/Size=RectanglewithFlatTop,1.2mmx0.8mm, Lens Type=Clear, Manufacturer URL=http://www.kingbright.com/, Mounting Technology=SurfaceMount, Mounting Type=SurfaceMount, Online Catalog=0603RectanglewithFlatTopChipLEDs, Other Names=754-1121-2, Packaging=Tape&Reel(TR), Size / Dimension=1.60mmLx0.80mmW, Viewing Angle=120°, Wavelength - Dominant=568nm, Wavelength - Peak=565nm
MCLR: library part CMP-1459-00005-1, "WS-TASV SMD Tact Switch 6.0X3.5 mm", Manufacturer="Wuerth Elektronik", ComponentLink1Description="Manufacturer URL", ComponentLink1URL=http://www.we-online.com, ComponentLink2Description=Datasheet, ComponentLink2URL=http://katalog.we-online.de/em/datasheet/434121043816.pdf, NoPins=02, PackageReference=434121043816, PartNumber=434121043816
Q1: library part MOSFET-P, "P-Channel MOSFET", LatestRevisionDate=17-Jul-2002, LatestRevisionNote="Re-released for DXP Platform.", PackageDescription="TO, Flat Index; 3 In-Line, Axial Leads; Body Dia. 4.6mm; Lead Dia. 0.5 mm (max)", PackageReference=E3, PackageVersion=1995/1996, Published=8-Jun-2000, Publisher="Altium Limited"
R1: library part CMP-1011-00001-2, "RC0402JR-070RL", Manufacturer="Yageo / Phycomp", Part Number=RC0402JR-070RL
R2: library part CMP-2002-00609-3, "Chip Resistor, 1 MOhm, +/- 1%, 100 mW, -55 to 155 degC, 0402 (1005 Metric), RoHS, Tape and Reel / ERJ-2RKF1004X", Case Code (Imperial)=0402, Case Code (Metric)=1005, Manufacturer="Basic Passives", Max Operating Temperature="155 degC", Min Operating Temperature="-55 degC", Package Quantity=10000, PartNumber=ERJ-2RKF1004X, Power Rating="100 mW", Resistance="1 MOhm", Tolerance=1%, Voltage Rating="50 V", Case\/Package=0402, ComponentLink1Description="Manufacturer URL", ComponentLink1URL=http://www.panasonic.com/, ComponentLink2Description=Datasheet, ComponentLink2URL=http://industrial.panasonic.com/cdbs/www-data/pdf/RDA0000/AOA0000C86.pdf, DatasheetVersion=04/2015, Height="0.35 mm", Length="1 mm", Mount="Surface Mount", Mounting Technology="Surface Mount", PackageDescription="2-Pin Surface Mount Device, Body 1 x 0.5 mm", PackageReference=0402, Packaging="Tape and Reel", Pins=2, Radiation Hardening=No, REACH SVHC=Yes, RoHSCompliant=true, Weight=2.8E-05oz, Width="0.5 mm"
R3: library part CMP-2000-07588-1, "Chip Resistor, 10 KOhm, +/- 1%, 0.1 W, -55 to 155 degC, 0402 (1005 Metric), RoHS, Tape and Reel / ERJ2RKF1002X", Case Code (Imperial)=0402, Case Code (Metric)=1005, Manufacturer=Panasonic, Max Operating Temperature=155degC, Max Power Dissipation=100mW, Min Operating Temperature=-55degC, Package Description="2-Pin Surface Mount Device, Body 1 x 0.5 mm", Package Quantity=1, Package Reference=402, Resistance=10KOhm, Temperature Coefficient=100ppm\/degreesC, Tolerance=1%, Voltage Rating=50V, Case\/Package=0402, Composition=ThickFilm, Contact Plating=Tin, Datasheet URL=https://industrial.panasonic.com/cdbs/www-data/pdf/RDA0000/AOA0000C304.pdf, Datasheet Version=02/2017, Depth=0.5mm, Height=0.35mm, Lead Free=LeadFree, Length=1mm, Manufacturer URL=http://www.panasonic.com/, Military Standard=Not, Mount=SurfaceMount, Mounting Technology=SurfaceMount, Number of Pins=2, Number of Terminations=2, Packaging=TapeandReel, Power Rating=100mW, Radiation Hardening=No, REACH SVHC=NoSVHC, RoHSCompliant=True, Termination=SMD/SMT, Voltage Rating (DC)=50V, Width=0.02inch
R4 R5 R6: library part CMP-1012-00062-2, "CRCW0603330RJNEA", Manufacturer="Vishay Dale", Part Number=CRCW0603330RJNEA
R9 R11: library part CMP-04015-080178-1, "100kΩ ±1% 0.125W Chip Resistor 0805 Thick Film AEC-Q200 Qualified", Case Code (Imperial)=0805, Case Code (Metric)=2012, Max Operating Temperature=125°C, Min Operating Temperature=-55°C, Power Rating=125mW, Resistance=100kR, Temperature Coefficient=50ppm/°C, Tolerance=1%, Voltage Rating=150V, Packaging="Tape and Reel", RoHS Compliant=Yes, Series=RK73G, Termination=SMD/SMT
R10: library part Res1, "Resistor", LatestRevisionDate=17-Jul-2002, LatestRevisionNote="Re-released for DXP Platform.", PackageDescription="Axial Device, Thru-Hole; 2 Leads; 0.3 in Pin Spacing", PackageReference=AXIAL-0.3, Published=8-Jun-2000, Publisher="Altium Limited"
R12: library part CMP-26527-006791-1, "22.1kΩ ±1% 0.125W 0805 Thick Film Chip Resistor AEC-Q200 compliant", Case Code (Imperial)=0805, Case Code (Metric)=2012, Max Operating Temperature=155°C, Max Power Dissipation=125mW, Min Operating Temperature=-55°C, Package Quantity=10000, Resistance=22.1kR, Resistor Type="Thick Film", Temperature Coefficient=100ppm/°C, Tolerance=1%, Case/Package=0805, Contact Plating=Tin, Features="Automotive AEC-Q200", Height=0.026inch, Lead Free="Lead Free", Length=0.079inch, Mount="Surface Mount", Number of Terminations=2, Packaging="Tape and Reel", Radiation Hardening=No, RoHS Compliant=Yes, Series=RMCF, Width=0.049inch
R27: library part CMP-2002-00605-3, "Chip Resistor, 100 Ohm, +/- 1%, 100 mW, -55 to 155 degC, 0402 (1005 Metric), RoHS, Tape and Reel", Case Code (Imperial)=0402, Case Code (Metric)=1005, Manufacturer="Basic Passives", Max Operating Temperature="155 degC", Min Operating Temperature="-55 degC", Package Quantity=10000, Power Rating="100 mW", Resistance="100 Ohm", Tolerance=1%, Voltage Rating="50 V", Case\/Package=0402, ComponentLink1Description="Manufacturer URL", ComponentLink1URL=http://www.panasonic.com/, ComponentLink2Description=Datasheet, ComponentLink2URL=http://industrial.panasonic.com/cdbs/www-data/pdf/RDA0000/AOA0000C86.pdf, DatasheetVersion=04/2015, Height="0.35 mm", Length="1 mm", Mount="Surface Mount", Mounting Technology="Surface Mount", PackageDescription="2-Pin Surface Mount Device, Body 1 x 0.5 mm", PackageReference=0402, Packaging="Tape and Reel", PartNumber=ERJ-2RKF1000X, Pins=2, Radiation Hardening=No, REACH SVHC=Yes, RoHSCompliant=true, Width="0.5 mm"
R28 R29: library part CMP-2002-00609-3, "Chip Resistor, 1 MOhm, +/- 1%, 100 mW, -55 to 155 degC, 0402 (1005 Metric), RoHS, Tape and Reel", Case Code (Imperial)=0402, Case Code (Metric)=1005, Manufacturer="Basic Passives", Max Operating Temperature="155 degC", Min Operating Temperature="-55 degC", Package Quantity=10000, Power Rating="100 mW", Resistance="1 MOhm", Tolerance=1%, Voltage Rating="50 V", Case\/Package=0402, ComponentLink1Description="Manufacturer URL", ComponentLink1URL=http://www.panasonic.com/, ComponentLink2Description=Datasheet, ComponentLink2URL=http://industrial.panasonic.com/cdbs/www-data/pdf/RDA0000/AOA0000C86.pdf, DatasheetVersion=04/2015, Height="0.35 mm", Length="1 mm", Mount="Surface Mount", Mounting Technology="Surface Mount", PackageDescription="2-Pin Surface Mount Device, Body 1 x 0.5 mm", PackageReference=0402, Packaging="Tape and Reel", PartNumber=ERJ-2RKF1004X, Pins=2, Radiation Hardening=No, REACH SVHC=Yes, RoHSCompliant=true, Weight=2.8E-05oz, Width="0.5 mm"
R30: library part CMP-2002-08171-2, "RES Thick Film, 121kΩ, 1%, 0.063W, 100ppm/°C, 0402", Case Code (Imperial)=0402, Case Code (Metric)=1005, Max Operating Temperature=155°C, Max Power Dissipation=63mW, Min Operating Temperature=-55°C, Package Quantity=10, Resistance=121kR, Temperature Coefficient=100ppm/°C, Tolerance=1%, Voltage Rating=50V, Case/Package=0402, Composition="Thick Film", Contact Plating=Tin, Depth=0.5mm, Features="Automotive AEC-Q200", Height=0.35mm, Lead Free="Lead Free", Length=1mm, Military Standard=Not, Number of Terminations=2, Packaging="Tape and Reel", Power Rating=63mW, Radiation Hardening=No, Termination=SMD/SMT, Voltage Rating (DC)=50V, Weight=2.3E-05oz, Width=0.5mm
R31: library part CMP-1011-00748-2, Manufacturer=Panasonic, Part Number=ERJ-2RKF1303X
U3: library part CMP-09093-000114-1, "IC DRIVER 1/0 8SOIC", Case/Package=SOIC, Max Operating Temperature=85°C, Max Supply Current=10mA, Max Supply Voltage=3.6V, Min Operating Temperature=-40°C, Min Supply Voltage=3V, Nominal Supply Current=7mA, Operating Supply Voltage=3.3V, Package Quantity=98, Data Rate=600Mbps, Height=1.5mm, Lead Free="Contains Lead", Length=5mm, Mount="Surface Mount", Number of Drivers=1, Number of Elements=1, Number of Pins=8, Number of Receivers=1, Operating Supply Current=7mA, Packaging=Rail/Tube, Propagation Delay=1.5ns, Radiation Hardening=No, REACH SVHC="No SVHC", RoHS Compliant=Yes, Series=-, Supply Current=7mA, Turn-On Delay Time=1.5ns, Width=4mm
U10: library part TI-TPS65130RGE24-2450X2450TP, "Boost Inverting Buck-Boost Voltage Converter with 2.7 to 5.5 V Input and -15 to 15 V Output, -40 to 85 degC, 24-Pin VQFN (RGE), Green (RoHS & no Sb/Br)", Manufacturer="Texas Instruments", PartNumber=TPS65130RGER, Switching Frequency(Typ)(kHz)=1400, Code_JEDEC=MO-220, ComponentLink1Description=Datasheet, ComponentLink1URL=http://www.ti.com/general/docs/lit/getliterature.tsp?genericPartNumber=TPS65130&fileType=pdf, ComponentLink2Description="Package Specification", ComponentLink2URL=http://www.ti.com/litv/pdf/mpqf124f, DatasheetVersion=SLVS493B, Eco-Plan="Green (RoHS & no Sb/Br)", Mounting Technology="Surface Mount", PackageDescription="24-Pin Plastic Quad Flatpack No-Lead, 4 x 4 mm Body, 0.5 mm Pitch", PackageReference=RGE0024B, PackageVersion="revG, Jul-2011", Regulated Outputs(#)=2, SubFamily="Step-Up Regulator", Topology="Boost, Inverting Buck-Boost", Vin(Max)(V)=5.5, Vin(Min)(V)=2.7, Vout2(V)="-15 to -2", Vout(Max)(V)=15, Vout(Min)(V)=-15
X1: library part CMP-27762-013587-1, "Crystal 20MHz ±20ppm 18pF SMD-2 6mm x 3.5mm / ABM7-20.000MHZ-D2Y-T", Case/Package=CSMD, ESR (Equivalent Series Resistance)=50R, Frequency Stability=30ppm, Frequency Tolerance=20ppm, Load Capacitance=18pF, Max Operating Temperature=85°C, Min Operating Temperature=-40°C, Operating Frequency="20 MHz", Package Quantity=1000, Resistor Type=Ceramic, Contact Plating=Gold, Depth=3.5mm, Frequency=20MHz, Height=0.055inch, Lead Free="Lead Free", Length=6mm, Mount="Surface Mount", Number of Pins=2, Packaging="Tape and Reel", Radiation Hardening=No, Series=ABM7, Series Resistance=50R, Termination=SMD/SMT, Tolerance=20ppm, Width=0.138inch
L1: Code_IEC=1005, Code_JEITA=0402, LatestRevisionDate=29-May-2009, LatestRevisionNote="IPC-7351 Footprint Added.", PackageDescription="Chip Inductor", PackageReference=0402-A, Published=8-Jun-2000, Publisher="Altium Limited"

## Via types
v1: diameter 15, hole 5, Top Layer to Bottom Layer, 45 vias
v2: diameter 50, hole 28, Top Layer to Bottom Layer, 6 vias
v3: diameter 30, hole 15, Top Layer to Bottom Layer, 3 vias
v4: diameter 35, hole 15, Top Layer to Bottom Layer, 1 vias

## Nets (pads, with @x,y where several pads share a name; then routed paths per layer and width w, separated by ;. In a path a pad name is that pad's centre, name@x,y a point inside that pad or via, vN(x,y) a via of type N, cw(c..) or ccw(c..) an arc to the next point about the centre after c; other vN are vias at no path point)
+3.3V: C1.1 C2.1 C3.1 C4.1 C8.1 C13.1 C18.1 C19.2 C26.2 C27.2 C29.1 J4.2 L2.2 Q1.3 R3.2 R11.1 R27.1 U1.10 U1.19 U1.26 U1.35 U1.38 U1.57 U2.25 U3.1 U10.5 U10.6 U10.8 U10.10 | length 4304.3
  Top Layer w8: 2384.04,1517.26 C18.1
  Top Layer w10: v1(1420,1565) 1440.58,1585.58 1484.42,1585.58 C1.1 1540.57,1586.16 1541.26,1585.47 U1.10 ; v1(1675,1220) 1675,1221.35 1660.58,1235.77 1660.58,1324.42 C2.1 1662,1325 1670.24,1333.24 1670.24,1344.77 1676.46,1350.98 1676.46,1390.32 U1.19 ; C8.1 1705,1945.32 1713.24,1937.08 1714.08,1937.08 1775.16,1876 U1.57 ; v1(1750,1150) 1814.42,1214.42 1814.42,1324.42 C3.1 1814.25,1325.41 U1.26@1814.25,1370.98 ; U2.25 1853.35,2101.61 1902.08,2052.88 1902.08,2048.24 1910.32,2040 C13.1 ; U1.38 2052.88,1565.79 2081.76,1536.91 C4.1 ; U1.35@2009.62,1506.52 U1.35 2049.02,1506.73 2058.32,1516.03 2058.32,1516.4 2064.38,1522.46 2069.01,1522.46 2081.76,1535.22 C4.1 ; v1(2175,1535) 2174.47,1535.53 2082.29,1535.53 C4.1 ; v1(2385,1530) 2384.04,1529.04 2384.04,1521.33 2361.65,1498.94 C19.2 2361.65,1429.92 U3.1@2390,1401.58 ; U3.1@2390,1390 U3.1@2390,1401.58 ; C18.1 2405.31,1495 2400.47,1490.16 2400.47,1489.17 2390,1478.7 U3.1@2390,1401.58
  Bottom Layer w10: R11.1 1125.93,1420.37 1106.22,1440.08 1106.22,1444.16 1035,1515.37 1035,1744.14 1040.86,1750 1277.96,1750 1305.56,1722.4 1362.28,1722.4 1375,1709.68 C27.2 ; C26.2@1379.68,1565 1375,1569.68 C27.2 ; C26.2 1390,1565 v1(1420,1565) ; v2(1515,1370) 1582.79,1302.21 1775.44,1302.21 1959.02,1485.79 L2.2 L2.2@1959.02,1584.21 ; U10.8@2119.8,1916.38 U10.8 2043.79,1916.46 ; U10.10 2046.08,1955.83 2032.5,1942.25 2032.5,1927.75 2043.79,1916.46 ; U10.5 U10.6 ; C27.2 1853.23,1690 L2.2@1959.02,1584.21 ; L2.2@1959.02,1584.21 2058.03,1683.23 2073.82,1683.23 Q1.3 2132.4,1741.81 2143.78,1741.81 2175,1773.03 C29.1 2175,1776.97 2153.11,1798.86 2153.11,1811.14 R27.1 2149.25,1860.04 2145.63,1863.66 U10.6 ; 2043.79,1916.46 2089.86,1870.39 U10.6
+5V: C11.1 C22.2 C23.2 J1.5 J1.6 J1.16 J1.17 J2.16 L1.2 R9.2 U2.29 | length 2489.1
  Top Layer w10: J1.6 1339.04,2307.54 1339.04,2357.69 v1@1341.35,2360 ; v1(1345,2360) 1344.04,2360.96 1341.72,2360.96 1328.5,2374.18 1328.5,2416.5 J1.17 J1.16 1350,2350 1362.5,2337.5 J1.5 ; U2.29 1949.95,2180.35 1968.25,2162.05 2009.13,2162.05 2020,2151.18 C11.1 v1(2020,2110)
  Bottom Layer w10: v4(1130,2215) 1130,2070.89 1125,2065.89 1125,1928.54 1151.8,1901.73 1284.25,1901.73 1402.52,2020 L1.2 1895.25,2020 1980.25,2105 1988.59,2105 1993.59,2110 v1(2020,2110) ; R9.2 1391.44,2530.37 v2(1395,2526.81) 1559.72,2526.81 1604.24,2482.29 1604.24,2466.41 1621.95,2448.7 C22.2 1675,2443.7 C23.2
+10.5V: C31.1 C36.1 D1.1 J2.14 R28.2 U10.23 | length 430.6
  Bottom Layer w10: U10.23 2276.22,1915.83 2280.98,1911.06 2285.44,1911.06 2297.74,1898.77 2297.74,1883.75 2310.03,1871.46 2352.2,1871.46 R28.2 2389.8,1879.45 C36.1 C31.1@2440,1834.3 ; D1.1 2387.56,1755 D1.1@2390.12,1755 ; C31.1 2440.82,1825.91 2440.82,1805.7 D1.1@2390.12,1755 ; v3(2455,1755) D1.1@2390.12,1755
-10V: C32.1 C37.2 D2.2 J2.18 R29.1 U10.15 | length 430.1
  Bottom Layer w10: D2.2@1935,2130 D2.2 1982.37,2120 1989.87,2127.5 2038.42,2127.5 2064.9,2101.01 ; C32.1 2064.9,2101.01 ; v3(2115,2175) 2117.5,2172.5 2117.5,2117.85 C37.2 2090.39,2115.35 R29.1 2081.14,2116.89 2080.78,2116.89 2064.9,2101.01 ; v3(2175,2059.65) 2175,2054.59 2184.92,2044.67 2184.92,2020.08 U10.15
A_GP0: J1.21 U1.4 | length 923.7
  Top Layer w10: J1.21 1200.29,2420 1180,2399.71 1180,2229.52 1179,2228.52 1179,2058.33 1533.47,1703.86 1560.32,1703.86 U1.4
A_GP1: J1.20 U1.5 | length 1156.4
  Top Layer w10: J1.20 1246.5,2423.5 1246.5,2465.14 1237.64,2474 1166.25,2474 1075,2382.75 1075,2141.12 1531.94,1684.17 U1.5@1540.98,1684.17
A_GP2: J1.19 U1.6 | length 1259
  Top Layer w10: J1.19 1271.5,2423.5 1271.5,2465.14 1247.64,2489 1160.04,2489 1060,2388.96 1060,2134.9 1530.41,1664.49 1560.32,1664.49 U1.6
A_SHDN: J1.11 U1.3 | length 741.7
  Top Layer w10: J1.11 1212.5,2046.04 1530.31,1728.23 1536.3,1728.23 1541.26,1723.27 U1.3
ADC_CH0_CH1_N: J2.13 U2.31 | length 289.9
  Top Layer w10: U2.31@1844.65,2220 2023.14,2220 2069,2265.86 2069,2307.5 J2.13
ADC_CH0_CH1_P: J2.12 U2.32 | length 253.3
  Top Layer w10: U2.32 2011.41,2239.41 2047.5,2275.5 J2.12
ADC_CH2_CH3_N: J2.1 U2.1 | length 353.5
  Top Layer w10: 1820,2280 1820,2345 1930,2455 2031.5,2455 2035,2451.5 J2.1
ADC_CH2_CH3_P: J2.2 U2.2 | length 444.5
  Top Layer w10: U2.2 1799.37,2349.37 1800,2350 1800,2355 1920,2475 2050.64,2475 2056.5,2469.14 2056.5,2428.5 J2.2
ADC_CH4_CH5_N: J1.13 U2.7 | length 460.2
  Top Layer w10: J1.13 1428.5,2423.5 1428.5,2465.14 1437.36,2474 1578.93,2474 1700.94,2351.98 U2.7
ADC_CH4_CH5_P: J1.12 U2.8 | length 386.5
  Top Layer w10: J1.12 1450,2450.5 1453.5,2454 1570,2454 1680,2344 U2.8@1680,2265
ADC_CH6_CH7_N: J1.1 U2.9 | length 249.5
  Top Layer w10: J1.1 1462.5,2261 1478.5,2245 1645,2245 1645.51,2244.49 1630.86,2244.49
ADC_CH6_CH7_P: J1.2 U2.10 | length 337.7
  Top Layer w10: 1441,2264.86 1441,2302.5 J1.2 1437.5,2257.72 1470.73,2224.49 1645,2224.49 1640.24,2219.72 ; 1636.89,2219.72 1640.24,2219.72 ; U2.10 1640.24,2219.72
B_GP0: J1.7 U1.63 | length 628.9
  Top Layer w10: J1.7 1312.5,2174.22 1465.53,2021.19 1499.06,2021.19 1656.77,1863.47 1656.77,1839.68 U1.63
B_GP1: J1.8 U1.64 | length 620.5
  Top Layer w10: J1.8 1287.5,2178 1621.76,1843.74 1637.09,1843.74 1637.36,1843.46 U1.64
B_GP2: J1.9 U1.1 | length 678.2
  Top Layer w10: J1.9 1262.5,2156.2 1540.98,1877.71 1540.98,1762.91 1541.26,1762.64 U1.1
B_SHDN: J1.10 U1.2 | length 710.8
  Top Layer w10: J1.10 1237.5,2042.26 1536.53,1743.23 1560.32,1743.23 U1.2
BSW: Q1.2 U10.7 | length 230
  Top Layer w10: v1(2045,1785) 2085,1825 v1(2085,1900)
  Bottom Layer w10: v1(2045,1785) 2045.96,1784.04 2045.96,1763.45 Q1.2 ; v1(2085,1900) 2086.35,1900 2089.58,1896.77 U10.7
BUSY: U1.60 U2.19 | length 266.9
  Top Layer w10: U1.60 1716.1,1893.6 1681.76,1927.94 1681.76,2002.06 1720.63,2040.93 U2.19
C_GP0: J2.21 U1.53 | length 708.6
  Top Layer w10: U1.53 1854.17,1839.68 1854.17,1872.82 1855.26,1873.9 v1@1855.26,1875.26 ; v1@2000,1945 2272.5,2217.5 J2.21
  Bottom Layer w10: v1(1853.9,1875.26) 1853.9,1908.9 1887.5,1942.5 v1(1999.68,1942.5)
C_GP1: J2.20 U1.54 | length 696
  Top Layer w10: U1.54 1834.49,1839.68 v1@1834.49,1889.49 ; v1(1980,1960) 1997.5,1977.5 1997.5,1982.5 2247.5,2232.5 J2.20
  Bottom Layer w10: v1(1834.21,1892.76) 1835.17,1893.71 1835.17,1911.04 1838.9,1914.77 1838.9,1915.11 1883.79,1960 v1(1980,1960)
C_GP2: J2.19 U1.55 | length 684.7
  Top Layer w10: U1.55 1814.76,1839.65 v1@1814.76,1909.76 ; v1@1960,1980 2222.5,2242.5 J2.19
  Bottom Layer w10: v1(1814.53,1910.26) 1814.53,1911.61 1823.9,1920.98 1823.9,1921.32 1880.02,1977.44 v1@1960.26,1977.44
  other v1: 1960.32,1977.5
C_SHDN: J2.11 U1.46 | length 834.8
  Top Layer w10: U1.46 2028.74,1723.27 2033.7,1728.23 2038.16,1728.23 2291,1981.07 2291,2387.5 2285,2393.5 J2.11
CB1: B1.6 C25.2 | length 173.9
  Bottom Layer w10: C25.2 1184.85,1534.95 1267.01,1452.8 B1.6
CB2: B2.6 C21.1 | length 145.2
  Bottom Layer w10: C21.1 1229.68,2384.82 1243.38,2398.52 1243.38,2449.52 1278.86,2485 B2.6
CN: C33.1 U10.18 | length 188.8
  Bottom Layer w10: U10.18 2244.06,2050.63 2338.42,2145 C33.1
CNV: U1.62 U2.16 | length 274.2
  Top Layer w10: U2.16 1655.67,2018.4 1651.76,2014.49 1651.76,1915.51 1676.73,1890.54 U1.62
CP: C34.1 U10.21 | length 146.4
  Bottom Layer w10: U10.21 2276.22,1955.2 2280.98,1959.96 2285.44,1959.96 2291.3,1965.82 2291.3,2003.46 2342.01,2054.17 C34.1
D_GP0: J2.7 U1.42 | length 1337.6
  Top Layer w10: U1.42 2009.68,1644.8 2039.59,1644.8 2452.5,2057.72 2452.5,2404.17 2336.67,2520 2242.36,2520 2188.5,2466.14 2188.5,2428.5 J2.7
D_GP1: J2.8 U1.43 | length 1254.7
  Top Layer w10: U1.43 2009.68,1664.49 2038.06,1664.49 2437.5,2063.93 2437.5,2397.96 2330.46,2505 2252.36,2505 2213.5,2466.14 2213.5,2428.5 J2.8
D_GP2: J2.9 U1.44 | length 1152.1
  Top Layer w10: U1.44@2029.02,1684.17 2036.53,1684.17 2422.5,2070.14 2422.5,2391.75 2324.25,2490 2262.36,2490 2238.5,2466.14 2238.5,2428.5 J2.9
D_SHDN: J2.10 U1.45 | length 973.2
  Top Layer w10: U1.45@2029.02,1703.86 2033.43,1708.27 2039.41,1708.27 2306,1974.86 2306,2466.64 2297.64,2475 2272.36,2475 2266.5,2469.14 2266.5,2463 2260,2456.5 J2.10
DOUT_N: J3.1 U3.8 | length 417.8
  Top Layer w10: J3.1 2140.46,1000 2155,1014.54 2155,1036.64 2181.36,1063 2251.04,1063 2382.25,1194.21 2382.25,1212.13 2410,1239.88
DOUT_P: J3.2 U3.7 | length 359.1
  Top Layer w10: J3.2 2140.08,1050 2173.08,1083 2221.04,1083 2332.25,1194.21 2332.25,1212.13 2360,1239.88
FB1: B1.4 R11.2 R12.2 | length 195.9
  Bottom Layer w10: R11.2 1135.89,1345.52 R12.2 1224.08,1345.52 1256.56,1377.99 B1.4
FB2: B2.4 R9.1 R10.2 | length 495.9
  Bottom Layer w10: R9.1 1047.3,2449.63 1045,2447.32 R10.2 1067.56,2432.64 1067.56,2346.69 1105.75,2308.5 1204.9,2308.5 1272.05,2375.64 1272.05,2403.39 1278.86,2410.2 B2.4
FBN: C37.1 R29.2 R30.2 U10.16 | length 449
  Top Layer w10: v1(2109.42,2020.64) 2110.38,2021.6 2110.38,2030.38 2180.64,2100.64 v1(2204.42,2100.64)
  Bottom Layer w10: R29.2 2089.61,2084.65 C37.1 2114.76,2079.41 2114.76,2065.22 2109.42,2059.88 v1(2109.42,2020.64) ; R30.2 2162.48,2148.15 2162.48,2107.52 2200.7,2069.3 ; v1(2204.42,2100.64) 2204.42,2073.03 2200.7,2069.3 ; U10.16@2204.61,2020.08 U10.16 2204.68,2056.82 2200.7,2060.81 2200.7,2069.3
FBP: C36.2 R28.1 R31.2 U10.22 | length 197.5
  Bottom Layer w10: U10.22 2269.57,1935.43 2291.46,1935.43 2299.17,1927.72 R31.2 2325.98,1926.73 2374.02,1926.73 R28.1 2395.75,1925.75 2405.27,1935.27 2405.27,1943.14 2432.13,1970 C36.2
GND: B1.1 B2.1 C1.2 C2.2 C3.2 C4.2 C5.2 C6.2 C7.2 C8.2 C9.2 C10.2 C11.2 C12.2 C13.2 C18.2 C19.1 C20.2 C22.1 C23.1 C24.2 C26.1 C27.1 C28.2 C29.2 C30.2 C31.2 C32.2 C33.2 C34.2 C35.2 J1.3 J1.4 J1.14 J1.15 J1.18 J2.3 J2.4 J2.5 J2.6 J2.15 J2.17 J3.8 J3.9 J3.10 J3.11 J3.13 J3.15 J3.16 J3.17 J3.18 J4.3 L4.1 MCLR.1 R4.2 R5.2 R6.2 R10.1 R12.1 R31.1 U1.9 U1.20 U1.25 U1.41 U2.11 U2.14 U2.15 U2.17 U2.23 U2.26 U2.27 U2.30 U2.33 U3.4 U10.2 U10.3 U10.9 U10.11 U10.19 U10.25 | length 6930.2